# Altium PCB SDI-FIBER.PcbDoc (part 2 of 2)
Units mm, origin at the board's own origin, x right, y up, seen from the top; angles counter-clockwise.
Board outline 80.01 x 32 mm, 4 copper layers (Top Layer, Layer 1, Layer 2, Bottom Layer), stack 1.065 mm thick; 109 components, 63 nets, 333 pads, 163 vias.
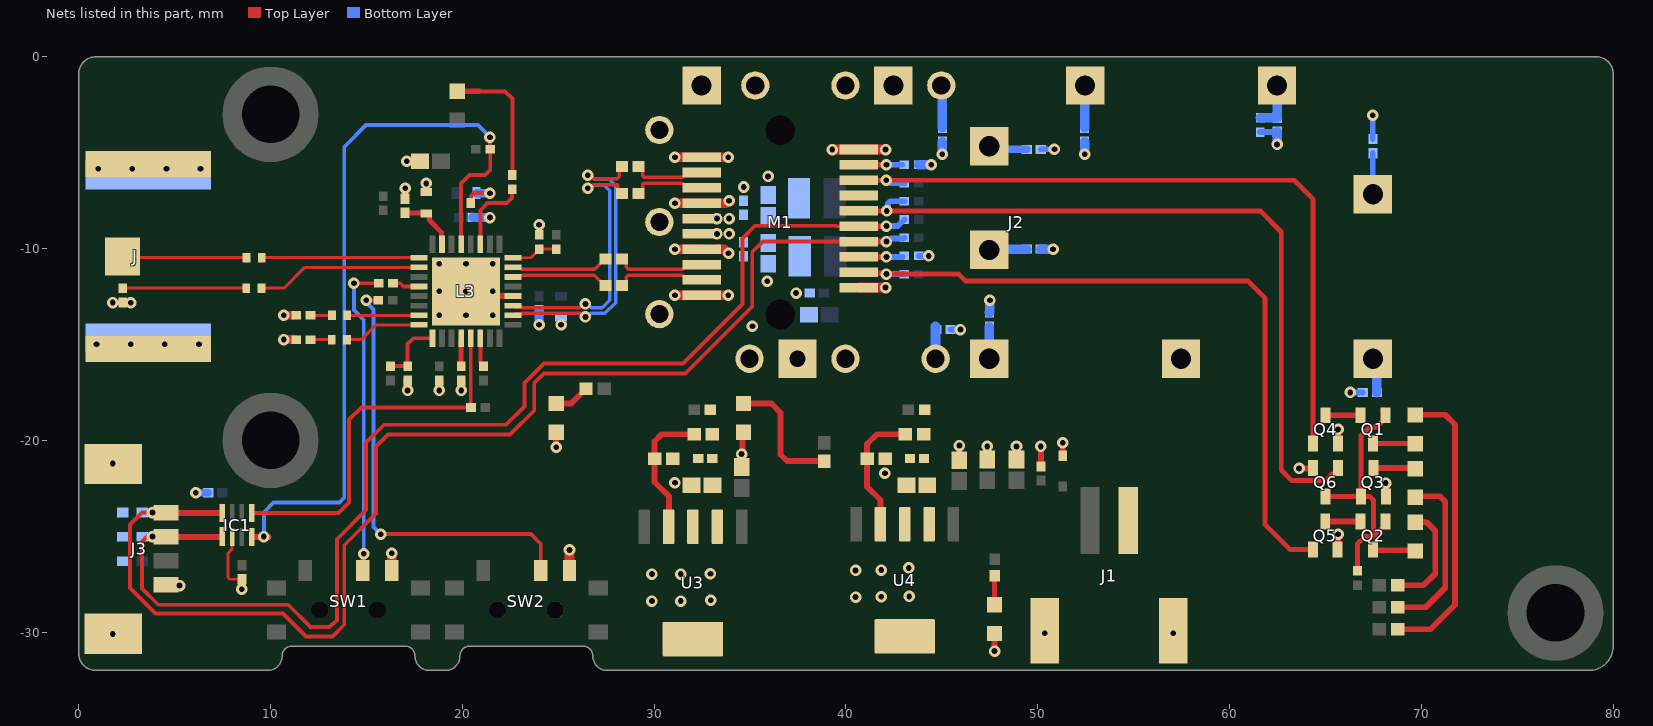
[diagram p4: the nets of this part, all layers, seen from the top]

## Via types
v1: diameter 0.6, hole 0.3, Top Layer to Bottom Layer, tented both sides, 163 vias

## Nets (pads, with @x,y where several pads share a name; then routed paths per layer and width w, separated by ;. In a path a pad name is that pad's centre, name@x,y a point inside that pad or via, vN(x,y) a via of type N, cw(c..) or ccw(c..) an arc to the next point about the centre after c; other vN are vias at no path point) (continued)
GND: C1.2 C2.2 C3.2 C4.2 C5.2 C6.2 C7.2 C8.2 C9.2 C10.2 C11.2 C12.2 C13.2 C14.2 C15.2 C16.2 C17.2 C18.2 C20.2 C21.2 C22.2 C23.2 C24.2 C25.2 C26.2 C27.2 C28.2 C29.2 C30.2 C31.2 C32.2 C35.2 C36.2 D1.2 D2.1 D3.1 D6.1 D7.1 D10.1 D11.1 IC1.2 J1.2 J1.MP1 J1.MP2 J3.4 J3.5 J3.6 J.S1 J.S2 J.S3 J.S4 L3.20 L3.33 M1.1 M1.10 M1.11 M1.14 M1.17 M1.20 Q3.2 Q4.2 Q5.2 Q6.2 R1.2 R9.2 R10.2 R11.2 R13.2 R14.2 R25.2 R26.2 R27.2 R32.1 R33.1 R34.2 R36.2 SW1.L2 SW2.L2 U3.3 U3.6 U4.3 U4.6 | length 52.4
  Top Layer w0.152: IC1.2@8.001,-25.044 8.001,-25.667 7.785,-25.883 7.785,-27.153 7.874,-27.242 C31.2@8.501,-27.242
  Top Layer w0.203: R1.2@20.439,-7.626 20.447,-7.618 20.447,-7.263 20.598,-7.112 v1(21.442,-7.112) ; R34.2@24.003,-9.283 v1(24.003,-8.763)
  Top Layer w0.3: v1(1.778,-12.815) 2.274,-12.815 R25.2@2.28,-12.821 ; C36.2@17.018,-7.395 v1(17.018,-6.858) ; C35.2@18.117,-7.062 v1(18.117,-6.604) ; v1(20.189,-12.229) 20.439,-12.479 L3.20@22.639,-12.479
  Top Layer w0.305: J3.4@4.572,-27.574 v1(5.254,-27.574) ; v1(24.892,-20.355) D6.1@24.892,-19.673 ; C20.2@34.561,-21.398 34.613,-21.346 34.613,-19.632 D7.1@34.664,-19.58 ; v1(45.919,-20.273) 45.919,-20.955 C23.2@45.934,-20.97 ; v1(47.371,-20.32) C17.2@47.371,-21.002 C17.2@47.386,-21.017 ; v1(47.752,-30.988) D3.1@47.752,-30.075 ; v1(48.895,-20.32) C16.2@48.895,-21.002 C16.2@48.91,-21.017 ; C18.2@50.165,-21.365 v1(50.165,-20.32) ; v1(51.308,-20.124) D1.2@51.308,-20.806 D1.2@51.323,-20.821 ; v1(63.627,-21.463) 64.309,-21.463 Q6.2@64.324,-21.448 ; v1(65.659,-24.892) 65.659,-25.574 Q5.2@65.674,-25.589 ; v1(65.659,-19.431) 65.659,-20.113 Q4.2@65.674,-20.128 ; v1(68.142,-22.225) 68.142,-22.907 Q3.2@68.157,-22.922
  Top Layer w0.381: R25.2@2.286,-12.815 2.289,-12.818 2.704,-12.818 v1(2.707,-12.821)
  Top Layer w0.457: v1(8.501,-27.762) C31.2@8.501,-27.242 ; v1(10.687,-14.749) R26.2@11.334,-14.749 ; v1(10.687,-13.479) R27.2@11.334,-13.479 ; v1(17.145,-17.399) R13.2@17.145,-16.879 ; v1(18.796,-17.399) R14.2@18.796,-16.879 ; v1(19.939,-17.399) R36.2@19.939,-16.879
  Top Layer w0.508: SW1.L2@16.317,-26.797 v1(16.317,-25.886) ; v1(17.101,-5.453) C26.2@17.798,-5.453 ; SW2.L2@25.588,-26.709 v1(25.588,-25.717) ; v1(31.087,-12.436) M1.20@32.476,-12.436 v1(33.865,-12.436) ; v1(31.087,-10.036) M1.17@32.476,-10.036 ; v1(31.087,-7.636) M1.14@32.476,-7.636 32.48,-7.632 33.76,-7.632 33.884,-7.507 v1(33.909,-7.507) ; v1(31.087,-5.236) M1.11@32.476,-5.236 v1(33.865,-5.236) ; M1.17@33.222,-10.04 33.648,-10.04 33.859,-10.251 v1(33.884,-10.251) ; v1(39.287,-4.836) M1.10@40.676,-4.836 v1(42.065,-4.836) ; M1.1@40.676,-12.036 v1(42.065,-12.036)
  Bottom Layer w0.254: C12.2@67.476,-4.289 C12.2@67.476,-4.256
  Bottom Layer w0.3: C10.2@50.165,-4.826 v1(50.876,-4.826) ; v1(66.294,-17.504) C11.2@66.955,-17.504 ; C12.2@67.476,-4.289 v1(67.476,-3.048)
  Bottom Layer w0.305: R9.2@43.8,-10.384 v1(44.323,-10.384) ; C13.2@45.452,-14.224 v1(45.974,-14.224) ; R10.2@61.595,-3.931 61.602,-3.924 62.485,-3.924 C14.2@62.488,-3.921
  Bottom Layer w0.381: v1(6.096,-22.733) C32.2@6.745,-22.733
  Bottom Layer w0.457: C30.2@20.556,-8.382 v1(21.442,-8.382) ; C28.2@20.743,-7.112 v1(21.442,-7.112) ; v1(24.003,-13.979) C29.2@24.003,-13.22
  Bottom Layer w0.5: R11.2@43.8,-5.636 v1(44.45,-5.636) ; v1(45.027,-5.08) C7.2@45.027,-4.431 ; C8.2@47.476,-13.335 47.49,-13.321 47.49,-12.748 47.511,-12.727 v1(47.511,-12.7) ; C9.2@50.165,-10.033 v1(50.8,-10.033) ; v1(52.451,-5.08) C15.2@52.451,-4.431 ; v1(62.484,-4.572) 62.488,-4.568 C14.2@62.488,-3.921
  other v1: 1.778,-30.099 50.371,-30.059 57.071,-30.059 29.886,-28.378 31.39,-28.378 32.959,-28.34 40.506,-28.175 41.839,-28.156 43.3,-28.137 29.886,-26.97 31.39,-26.97 32.934,-26.951 40.506,-26.782 41.839,-26.763 43.275,-26.651 31.087,-22.215 42.037,-21.717 1.778,-21.209 34.561,-20.716 0.929,-14.986 2.707,-14.986 4.485,-14.986 6.263,-14.986 35.129,-14.053 25.146,-13.979 18.796,-13.479 20.189,-13.479 21.59,-13.479 37.401,-12.319 18.796,-12.229 21.59,-12.229 35.897,-11.707 18.796,-10.795 20.189,-10.795 21.59,-10.795 34.671,-6.791 35.941,-6.24 1.016,-5.842 2.794,-5.842 4.572,-5.842 6.35,-5.842
HOST_EQ0: L3.9 R3.2 R13.1 | length 3.5
  Top Layer w0.203: R3.2@16.256,-16.129 R13.1@17.145,-16.129 17.145,-14.986 17.452,-14.679 L3.9@18.439,-14.679
I2C_SCL: D10.2 IC1.1 J3.2 M1.5 R7.2 | length 63.4
  Top Layer w0.203: J3.2@4.413,-25.044 4.388,-25.019 v1(3.843,-25.019) 3.556,-25.019 3.302,-25.273 3.302,-27.733 4.144,-28.575 10.922,-28.575 12.09,-29.743 13.081,-29.743 13.462,-29.362 13.462,-25.157 14.986,-23.633 14.986,-20.11 15.906,-19.189 22.28,-19.189 23.241,-18.228 23.241,-17.018 24.257,-16.002 31.496,-16.002 34.61,-12.888 34.61,-9.469 35.27,-8.809 39.476,-8.809 ; 39.476,-8.836 M1.5@40.676,-8.836
  Top Layer w0.3: J3.2@4.413,-25.044 7.476,-25.044 IC1.1@7.476,-25.019 ; M1.5@40.676,-8.836 40.681,-8.831 42.109,-8.831 v1(42.114,-8.826)
  Bottom Layer w0.3: v1(42.114,-8.826) 42.708,-8.826 R7.2@43.05,-8.485
I2C_SDA: D2.2 IC1.8 J3.1 M1.4 R8.2 | length 65.4
  Top Layer w0.203: J3.1@4.413,-23.794 4.383,-23.764 v1(3.843,-23.764) 3.302,-23.764 2.667,-24.399 2.667,-27.695 4,-29.028 10.66,-29.028 11.858,-30.226 13.233,-30.226 13.843,-29.616 13.843,-25.469 15.494,-23.818 15.494,-20.32 16.117,-19.697 22.49,-19.697 23.749,-18.439 23.749,-17.018 24.257,-16.51 31.623,-16.51 35.118,-13.015 35.118,-10.182 35.67,-9.631 40.622,-9.631 M1.4@40.633,-9.62
  Top Layer w0.3: J3.1@4.413,-23.794 IC1.8@7.476,-23.794 ; M1.4@40.676,-9.636 v1(42.114,-9.636)
  Bottom Layer w0.3: v1(42.114,-9.636) 42.195,-9.636 42.35,-9.481 43.003,-9.481 R8.2@43.05,-9.434
IN0_C_N: C39.2 L3.18 | length 15.9
  Top Layer w0.179: L3.18@22.639,-13.479 22.7,-13.418 23.068,-13.418 23.104,-13.382 26.117,-13.382 26.302,-13.567 v1(26.416,-13.567) ; v1(26.543,-6.182) 26.657,-6.182 26.842,-6.367 28.067,-6.367 28.172,-6.263 28.172,-5.864 C39.2@28.321,-5.715
  Bottom Layer w0.179: v1(26.416,-13.567) 26.53,-13.567 26.715,-13.382 27.432,-13.382 27.992,-12.822 27.992,-6.731 27.627,-6.367 26.842,-6.367 26.657,-6.182 v1(26.543,-6.182)
IN0_C_P: C38.2 L3.19 | length 14.6
  Top Layer w0.179: L3.19@22.639,-12.979 22.7,-13.04 23.068,-13.04 23.104,-13.076 26.117,-13.076 26.302,-12.891 v1(26.416,-12.891) ; v1(26.543,-6.858) 26.657,-6.858 26.842,-6.673 28.067,-6.673 28.103,-6.708 28.103,-6.927 28.3,-7.124 C38.2@28.321,-7.124
  Bottom Layer w0.179: v1(26.416,-12.891) 26.53,-12.891 26.715,-13.076 27.305,-13.076 27.686,-12.696 27.686,-6.985 27.374,-6.673 26.842,-6.673 26.657,-6.858 v1(26.543,-6.858)
LOCK0: L3.27 R35.2 | length 4.1
  Top Layer w0.203: L3.27@20.939,-9.779 20.939,-8.001 21.308,-7.632 22.316,-7.632 22.582,-7.366 22.582,-6.939 R35.2@22.606,-6.916
MOD_ABS: M1.6 Q6.1 R4.2 | length 39.7
  Top Layer w0.254: M1.6@40.676,-8.036 v1@42.114,-8.036 ; v1(42.136,-8.036) 61.595,-8.036 62.697,-9.138 62.697,-21.549 63.246,-22.098 65.013,-22.098 65.371,-21.74 65.526,-21.74 65.659,-21.607 Q6.1@65.659,-21.452
  Bottom Layer w0.3: v1(42.136,-8.036) 42.193,-7.979 42.193,-7.653 42.312,-7.535 R4.2@43.05,-7.535
MOD_PRST: Q1.1 Q2.1 Q3.1 Q6.3 R22.2 | length 13.6
  Top Layer w0.254: Q6.3@65.009,-22.922 Q3.1@66.857,-22.922 ; R22.2@66.675,-26.797 66.675,-25.4 67.056,-25.019 67.507,-25.019 ; Q2.1@68.142,-24.229 68.142,-24.384 67.507,-25.019 ; Q3.1@66.857,-22.922 66.857,-19.757 67.31,-19.304 67.683,-19.304 68.142,-18.846 Q1.1@68.142,-18.691 ; Q3.1@66.857,-22.922 67.31,-22.922 67.507,-23.119 67.507,-25.019 ; Q1.1@68.142,-18.691 68.142,-18.536 68.086,-18.48 68.009,-18.403 68.009,-18.558 68.064,-18.613 Q1.1@68.142,-18.691
MODE_SEL: L3.12 R36.1 | length 1.4
  Top Layer w0.254: R36.1@19.939,-16.129 L3.12@19.939,-14.679
NetC3_1: C3.1 C4.1 L1.2 M1.15 | length 0.1
  Top Layer w0.3: M1.15@32.376,-8.336 M1.15@32.476,-8.436
  other v1: 33.274,-8.436 33.909,-8.436
NetC5_1: C5.1 C6.1 L2.2 M1.16 | length 0.1
  Top Layer w0.3: M1.16@32.422,-9.29 M1.16@32.476,-9.236
  other v1: 33.274,-9.236 33.909,-9.236
NetC7_1: C7.1 C8.1 C9.1 C10.1 C11.1 C12.1 C13.1 C14.1 C15.1 J2.MH1 J2.MH2 J2.MH3 J2.MH4 J2.MH5 J2.MH6 J2.MH7 J2.MH8 J2.MH9 J2.MH10 J2.MH11 J2.MH12 J2.MH13 J2.MH14 J2.MH15 J2.MH16 J2.MH17 J2.MH18 J2.MH19 J2.MH20 R10.1 | length 18.1
  Bottom Layer w0.254: J2.MH1@67.437,-15.709 J2.MH1@67.476,-15.748
  Bottom Layer w0.3: J2.MH20@47.476,-4.668 J2.MH20@47.634,-4.826 ; J2.MH2@67.476,-7.168 C12.1@67.476,-5.022
  Bottom Layer w0.381: J2.MH20@47.634,-4.826 C10.1@49.432,-4.826
  Bottom Layer w0.5: C7.1@45.027,-3.697 J2.MH5@45.027,-1.677 ; J2.MH17@47.476,-15.748 C8.1@47.476,-14.068 ; J2.MH19@47.476,-10.068 47.511,-10.033 C9.1@49.432,-10.033 ; J2.MH4@52.426,-1.55 52.451,-1.575 C15.1@52.451,-3.697 ; R10.1@61.595,-3.181 61.597,-3.183 C14.1@62.492,-3.183 J2.MH3@62.492,-1.55 ; J2.MH1@67.476,-15.748 67.689,-15.961 C11.1@67.689,-17.504
  Bottom Layer w0.508: J2.MH16@44.676,-15.748 C13.1@44.676,-14.068
NetC21_1: C21.1 C22.1 R23.2 R29.1 U3.2
NetC24_1: C24.1 C25.1 R24.2 R31.2 U4.2
NetC35_1: C35.1 C36.1 L3.31 | length 3
  Top Layer w0.254: C36.1@17.018,-8.128 17.035,-8.145 C35.1@18.017,-8.145 ; C35.1@18.117,-8.162 18.208,-8.162 18.291,-8.245 18.291,-8.539 18.92,-9.168 18.92,-9.76 L3.31@18.939,-9.779
NetD3_2: D3.2 R17.2 | length 1.5
  Top Layer w0.254: D3.2@47.752,-28.575 R17.2@47.752,-27.051
NetD4_1: D4.1 Q1.3 | length 2.2
  Top Layer w0.254: Q1.3@67.492,-20.161 69.699,-20.161 D4.1@69.714,-20.176
NetD4_2: D4.2 R20.2 | length 15.2
  Top Layer w0.3: R20.2@68.768,-29.845 70.485,-29.845 71.755,-28.575 71.755,-19.177 71.247,-18.669 D4.2@69.721,-18.669
NetD5_1: D5.1 Q2.3 | length 2.2
  Top Layer w0.3: Q2.3@67.492,-25.699 67.527,-25.734 69.643,-25.734 D5.1@69.678,-25.769
NetD5_2: D5.2 R21.2 | length 5.7
  Top Layer w0.3: R21.2@68.768,-27.559 70.119,-27.559 70.724,-26.954 70.724,-24.71 70.283,-24.269 70.129,-24.269 70.089,-24.229 69.718,-24.229 D5.2@69.678,-24.269
NetD6_2: D6.2 R30.2 | length 1.9
  Top Layer w0.3: D6.2@24.892,-18.08 25.677,-18.08 26.249,-17.508 26.249,-17.483 26.424,-17.308 R30.2@26.449,-17.308
NetD7_2: D7.2 R2.2 | length 6.7
  Top Layer w0.3: D7.2@34.664,-18.08 36.114,-18.08 36.593,-18.559 36.593,-20.735 36.94,-21.082 R2.2@38.878,-21.082
NetD8_1: D8.1 Q3.3 | length 2.2
  Top Layer w0.3: Q3.3@67.507,-21.452 67.522,-21.437 69.678,-21.437 D8.1@69.693,-21.422
NetD8_2: D8.2 R18.2 | length 9.1
  Top Layer w0.3: R18.2@68.768,-28.702 70.231,-28.702 71.247,-27.686 71.247,-23.187 70.982,-22.922 D8.2@69.693,-22.922
NetD9_1: D9.1 R35.1 | length 8.2
  Top Layer w0.203: D9.1@19.734,-1.802 22.225,-1.802 22.606,-2.183 R35.1@22.606,-6.165
  Top Layer w0.305: D9.1@19.734,-1.802 20.894,-1.802
NetQ1_2: Q1.2 Q4.3 | length 1.8
  Top Layer w0.3: Q4.3@65.009,-18.691 Q1.2@66.842,-18.691
NetQ2_2: Q2.2 Q5.3 | length 1.8
  Top Layer w0.3: Q5.3@64.994,-24.229 Q2.2@66.842,-24.229
NetR15_2: R15.2 SW1.COM | length 16.5
  Top Layer w0.203: v1(14.351,-11.811) R15.2@15.633,-11.811
  Top Layer w0.3: SW1.COM@14.817,-26.797 14.838,-26.776 14.838,-25.929 v1(14.859,-25.908)
  Bottom Layer w0.203: v1(14.351,-11.811) 14.351,-13.208 14.859,-13.716 v1(14.859,-25.908)
NetR19_2: R19.2 SW2.COM | length 23
  Top Layer w0.203: v1(14.986,-12.7) R19.2@15.621,-12.7 ; v1(15.748,-24.892) 23.58,-24.892 24.088,-25.4 SW2.COM@24.088,-26.709
  Bottom Layer w0.203: v1(14.986,-12.7) 14.986,-12.793 15.367,-13.174 15.367,-24.511 v1(15.748,-24.892)
NetR29_2: R29.2 R32.2 U3.4 | length 7
  Top Layer w0.3: U3.4@30.751,-24.507 30.772,-24.486 30.772,-22.919 30.022,-22.169 R32.2@30.022,-20.955 30.022,-20.061 30.398,-19.685 R29.2@32.087,-19.685
NetR31_1: R31.1 R33.2 U4.4 | length 6.7
  Top Layer w0.3: U4.4@41.8,-24.376 41.8,-23.114 41.104,-22.418 41.104,-20.197 41.616,-19.685 R31.1@43.103,-19.685
OUT0_C_N: C41.2 L3.22 | length 5.1
  Top Layer w0.179: L3.22@22.639,-11.479 22.7,-11.418 23.068,-11.418 23.104,-11.382 24.487,-11.382 26.886,-11.382 27.442,-11.938 C41.2@27.464,-11.938
OUT0_C_P: C40.2 L3.23 | length 5.1
  Top Layer w0.179: L3.23@22.639,-10.979 22.7,-11.04 23.068,-11.04 23.104,-11.076 24.613,-11.076 26.907,-11.076 27.442,-10.541 C40.2@27.464,-10.541
OUT0_SEL: L3.4 R15.1 | length 1.4
  Top Layer w0.203: R15.1@16.383,-11.811 16.764,-11.811 16.932,-11.979 L3.4@17.739,-11.979
RD_N: C39.1 M1.12 | length 3.8
  Top Layer w0.179: C39.1@29.178,-5.715 29.2,-5.715 29.397,-5.912 29.397,-6.216 29.464,-6.283 31.479,-6.283 31.726,-6.036 M1.12@32.476,-6.036
RD_P: C38.1 M1.13 | length 3.8
  Top Layer w0.179: C38.1@29.178,-7.124 29.2,-7.124 29.397,-6.927 29.397,-6.656 29.464,-6.589 31.479,-6.589 31.726,-6.836 M1.13@32.476,-6.836
RS0: M1.7
RS1: M1.9 R11.1 | length 2.2
  Top Layer w0.3: M1.9@40.676,-5.636 v1(42.114,-5.636)
  Bottom Layer w0.3: v1(42.114,-5.636) R11.1@42.925,-5.636
RX_LOS: M1.8 Q4.1 R5.2 | length 37.8
  Top Layer w0.254: M1.8@40.676,-6.436 v1(42.109,-6.436) 63.373,-6.436 64.359,-7.422 Q4.1@64.359,-20.161
  Bottom Layer w0.3: v1(42.109,-6.436) 42.19,-6.436 42.34,-6.586 R5.2@43.05,-6.586
SCL_2V5: IC1.4 L3.29 R44.2 | length 40.3
  Top Layer w0.203: v1(9.652,-25.019) 9.672,-25.039 v1@9.911,-25.039 ; L3.29@19.939,-9.779 19.939,-6.604 20.378,-6.165 21.189,-6.165 21.457,-5.897 R44.2@21.457,-4.826 21.45,-4.819 21.45,-4.198 v1(21.442,-4.191)
  Top Layer w0.3: IC1.4@9.026,-25.044 9.906,-25.044 v1@9.911,-25.039
  Bottom Layer w0.203: v1(9.652,-25.019) 9.652,-23.749 10.16,-23.241 13.589,-23.241 13.843,-22.987 13.843,-4.699 14.986,-3.556 20.807,-3.556 v1(21.442,-4.191)
SDA_2V5: IC1.5 L3.13 R43.2 | length 19.8
  Top Layer w0.203: IC1.5@9.026,-23.794 10.922,-23.794 12.446,-23.794 13.544,-23.794 14.097,-23.241 14.097,-18.923 14.732,-18.288 20.439,-18.288 L3.13@20.439,-14.679
SDI0_IO_C_N: C33.2 L3.2 | length 8.7
  Top Layer w0.158: C33.2@9.525,-12.065 10.699,-12.065 11.785,-10.979 L3.2@17.739,-10.979
SDI0_IO_C_P: C19.2 L3.1 | length 8.2
  Top Layer w0.158: C19.2@9.544,-10.479 L3.1@17.739,-10.479
SDI0_IO_N: C33.1 R25.1 | length 6.4
  Top Layer w0.158: R25.1@2.286,-12.065 C33.1@8.725,-12.065
SDI0_IO_P: C19.1 J.1 | length 6.5
  Top Layer w0.158: J.1@2.286,-10.414 2.351,-10.479 C19.1@8.744,-10.479
SDI0_OUT+: C34.1 R26.1 | length 1.1
  Top Layer w0.158: R26.1@12.084,-14.749 C34.1@13.189,-14.749
SDI0_OUT-: C37.1 R27.1 | length 1.1
  Top Layer w0.158: R27.1@12.084,-13.479 C37.1@13.208,-13.479
SDI0_OUT_C+: C34.2 L3.8 | length 4.1
  Top Layer w0.158: C34.2@13.989,-14.749 14.732,-14.749 15.502,-13.979 L3.8@17.739,-13.979
SDI0_OUT_C-: C37.2 L3.7 | length 3.7
  Top Layer w0.158: C37.2@14.008,-13.479 L3.7@17.739,-13.479
SDI_OUT_SEL: L3.14 R12.2 | length 1.5
  Top Layer w0.203: L3.14@20.939,-14.679 20.939,-15.937 21.106,-16.104 R12.2@21.106,-16.129
SDI_VOD: L3.24 R34.1 R37.2 | length 2.5
  Top Layer w0.152: L3.24@22.639,-10.479 23.582,-10.479 24.003,-10.058 R34.1@24.003,-10.033 R37.2@24.892,-10.033
TD_N: C41.1 M1.19 | length 4.6
  Top Layer w0.179: C41.1@28.321,-11.938 28.342,-11.938 28.539,-11.741 28.539,-11.497 28.644,-11.392 30.48,-11.392 30.483,-11.389 31.479,-11.389 31.726,-11.636 M1.19@32.476,-11.636
TD_P: C40.1 M1.18 | length 4.6
  Top Layer w0.179: C40.1@28.321,-10.541 28.342,-10.541 28.539,-10.738 28.539,-10.982 28.644,-11.087 30.353,-11.087 30.357,-11.083 31.479,-11.083 31.726,-10.836 M1.18@32.476,-10.836
TX_DISABLE: M1.3 R9.1 | length 2.3
  Top Layer w0.3: M1.3@40.676,-10.436 v1(42.114,-10.436)
  Bottom Layer w0.3: v1(42.114,-10.436) R9.1@42.947,-10.436
TX_FAULT: M1.2 Q5.1 R6.2 | length 37.4
  Top Layer w0.254: M1.2@40.676,-11.236 40.724,-11.284 v1@42.065,-11.284 ; v1(42.114,-11.333) 45.877,-11.333 46.228,-11.684 60.96,-11.684 61.849,-12.573 61.849,-24.384 63.164,-25.699 Q5.1@64.344,-25.699
  Bottom Layer w0.3: v1(42.114,-11.333) R6.2@43.05,-11.333
pads on no net: L3.3 L3.6 L3.10 L3.15 L3.16 L3.17 L3.25 L3.26 M1.21 M1.22 SW1.M1 SW1.M2 SW1.M3 SW1.M4 SW1.M5 SW1.M6 SW2.M1 SW2.M2 SW2.M3 SW2.M4 SW2.M5 SW2.M6

## Polygon pours and split planes (outlines as drawn)
+2V5 on Bottom Layer "+2V5_L04_P000" (solid, remove dead copper, pour order 0): 16.317,-26.416 16.764,-25.969 16.764,-18.542 15.875,-17.653 15.875,-16.891 16.256,-16.51 21.59,-16.51 22.352,-15.748 22.352,-9.525 21.522,-8.695 18.982,-8.695 18.796,-8.509 18.796,-4.191 18.923,-4.064 25.273,-4.064 26.162,-4.953 26.162,-16.51 26.67,-17.018 30.607,-17.018 30.734,-17.145 30.734,-19.05 30.607,-19.177 26.162,-19.177 25.654,-19.685 25.654,-27.686 25.146,-28.194 11.354,-28.194 10.541,-27.381 10.541,-24.903 10.922,-24.522 12.584,-24.522 13.081,-25.019 13.081,-26.142 13.355,-26.416
GND on Layer 1 "GND_L02_P001" (solid, remove dead copper, pour order 1): 0,0 0,-32 80.01,-32 80.01,0
GND on Layer 2 "GND_L03_P002" (solid, remove dead copper, pour order 2): 0,0 0,-32 80.01,-32 80.01,0

## Keep-outs
Keep-Out Layer:
  lines w0.254: 0.885,-0.004 ccw(c0.885,-0.889) 0,-0.889 ; 0.885,0 79.121,0 cw(c79.121,-0.885) 80.006,-0.885 ; 80,-30.73 80,-0.879 ; 80.01,-30.73 cw(c78.74,-30.73) 78.74,-32 28.207,-32 27.56,-32 cw(c27.56,-31.242) 26.802,-31.242 ccw(c26.294,-31.242) 26.294,-30.734 20.382,-30.734 ccw(c20.382,-31.242) 19.874,-31.242 cw(c19.116,-31.242) 19.116,-32 18.289,-32 cw(c18.289,-31.242) 17.531,-31.242 ccw(c17.023,-31.242) 17.023,-30.734 11.111,-30.734 ccw(c11.111,-31.242) 10.603,-31.242 cw(c9.845,-31.242) 9.845,-32 9.198,-32 0.885,-32 cw(c0.885,-31.115) 0,-31.115 0,-0.889 ; 0,-0.889 0,-0.889

## Other copper
Top Layer:
  region net NetC24_1: 43.742,-18.888 43.742,-17.713 44.721,-17.713 44.721,-25.093 cw(c44.287,-25.093) 44.594,-25.4 cw(c44.287,-25.093) 44.287,-25.527 43.832,-25.527 ccw(c43.525,-25.527) 43.742,-25.31
  region: 1329 vertices and 0 holes, not listed, extent 0.896,-4.653 5.302,-0.366
  region net GND: 54.102,-26.289 54.229,-26.416 55.626,-26.416 55.753,-26.289 55.753,-17.018 55.372,-16.637 49.418,-16.637 48.72,-17.335 45.734,-17.335 45.356,-17.713 45.356,-20.129 45.673,-20.447 53.474,-20.447 54.102,-21.075 54.102,-24.194
  region net GND: 42.435,-23.241 42.435,-25.4 42.308,-25.527 40.53,-25.527 39.768,-26.289 39.768,-31.242 44.721,-31.242 44.721,-26.67 43.578,-25.527 43.578,-20.32 41.673,-20.32 41.546,-20.447 41.546,-22.352
  region net GND: 32.91,-26.035 33.037,-26.162 36.639,-26.162 37.25,-25.551 40.53,-25.551 40.554,-25.527 43.578,-25.527 44.814,-26.763 45.849,-26.763 46.345,-27.259 46.345,-31.379 46.101,-31.623 28.846,-31.623 28.321,-31.098 28.321,-26.179 28.846,-25.654 28.973,-25.781 31.386,-25.781 31.513,-25.654 31.513,-23.131 30.751,-22.369 30.751,-20.574 30.878,-20.447 32.402,-20.447 32.402,-25.527
  region net +3V3: 42.689,-18.923 43.534,-18.923 43.534,-17.713 42.687,-17.713
  region net +3V3: 38.227,-17.272 37.846,-17.653 37.846,-20.066 38.1,-20.32 40.005,-20.32 40.386,-20.32 41.656,-19.05 43.434,-19.05 43.561,-18.923 43.561,-17.399 43.434,-17.272 42.799,-17.272 42.672,-17.145 42.672,-12.573 42.545,-12.446 40.64,-12.446 40.513,-12.573 40.513,-14.732 41.021,-15.24 41.021,-16.256 40.005,-17.272
  region net +2V5: 11.06,-24.384 12.446,-24.384 12.567,-24.505 12.567,-27.946 12.446,-28.067 11.303,-28.067 11.176,-27.94 11.176,-26.797 8.255,-26.797 8.255,-23.114 8.776,-23.114 8.776,-25.794 10.528,-25.794 10.668,-25.654 10.668,-24.776
  region net +5V: 53.213,-26.416 53.34,-26.289 53.34,-22.098 53.086,-21.844 45.483,-21.844 45.229,-22.098 45.229,-26.059 45.586,-26.416 51.943,-26.416
  region net +2V5: 18.796,-3.385 18.879,-3.302 20.588,-3.302 20.701,-3.415 20.701,-5.326 20.439,-5.588 19.939,-5.588 19.685,-5.842 19.685,-10.287 19.177,-10.287 19.177,-8.874 18.796,-8.493
  region net +2V5: 25.527,-11.684 25.654,-11.811 25.654,-12.192 25.527,-12.319 23.331,-12.319 23.241,-12.229 22.098,-12.229 22.098,-11.811 23.241,-11.811 23.368,-11.684
  region net +2V5: 32.383,-17.266 32.383,-19.02 32.274,-19.129 27.56,-19.129 27.261,-18.83 27.261,-17.308 27.557,-17.012 32.146,-17.012 32.21,-17.012 32.298,-17.012 32.383,-17.097
  region net NetC21_1: 33.799,-25.527 33.672,-25.654 32.783,-25.654 32.656,-25.527 32.656,-17.911 33.799,-17.911
  region net +5V: 29.718,-25.527 29.972,-25.273 29.972,-22.733 29.591,-22.352 29.083,-22.352 28.956,-22.479 28.956,-25.4 29.091,-25.518 29.1,-25.527
  region net +5V: 34.18,-21.971 34.18,-25.527 34.688,-26.035 36.466,-26.035 36.72,-25.781 36.72,-22.098 36.593,-21.971
  region net NetC5_1: 31.496,-8.928 34.163,-8.928 34.29,-9.055 34.29,-9.436 34.163,-9.563 31.496,-9.563
  region net NetC3_1: 31.496,-8.128 34.163,-8.128 34.29,-8.255 34.29,-8.636 34.163,-8.763 31.496,-8.763
Bottom Layer:
  region net +3V3: 3.302,-26.035 4.191,-26.035 4.318,-26.162 4.318,-26.543 4.191,-26.67 3.302,-26.67
  region net I2C_SCL: 3.302,-24.75 4.191,-24.75 4.318,-24.877 4.318,-25.258 4.191,-25.385 3.302,-25.385
  region net I2C_SDA: 3.302,-23.495 4.191,-23.495 4.318,-23.622 4.318,-24.003 4.191,-24.13 3.302,-24.13
  region net GND: 2.159,-20.828 2.413,-21.082 2.413,-21.209 2.413,-30.099 2.159,-30.353 1.143,-30.353 0.889,-30.099 0.889,-20.955 1.016,-20.828
  region net GND: 32.385,-7.239 32.403,-7.257 32.403,-7.636 32.641,-7.874 35.014,-7.874 35.252,-7.636 36.288,-7.636 36.552,-7.372 36.522,-7.342 36.522,-6.24 36.45,-6.168 32.453,-6.168 32.398,-6.223
  region net GND: 35.306,-14.478 35.687,-14.097 35.687,-12.954 36.195,-12.446 36.957,-12.446 37.476,-12.965 37.476,-14.362 37.592,-14.478 38.481,-14.478 38.481,-11.938 38.354,-11.811 36.552,-11.811 36.341,-11.6 36.341,-10.4 35.137,-10.4 34.773,-10.036 33.638,-10.036 33.274,-10.4 33.274,-14.224 33.528,-14.478
  region net +3V3: 39.878,-13.986 43.291,-13.986 43.688,-13.589 45.085,-13.589 45.466,-13.208 45.466,-6.477 45.212,-6.223 43.688,-6.223 43.561,-6.35 43.561,-9.525 43.688,-9.652 44.577,-9.652 44.704,-9.779 44.704,-10.795 44.577,-10.922 43.815,-10.922 43.688,-11.049 43.688,-12.319 43.561,-12.446 40.64,-12.446 40.276,-12.082 40.276,-6.24 40.132,-6.096 38.862,-6.096 38.735,-6.223 38.735,-13.843 38.878,-13.986
  region net +5V: 34.173,-24.648 34.036,-24.511 29.21,-24.511 28.956,-24.257 28.956,-22.342 29.083,-22.215 30.276,-22.215 30.794,-22.733 33.655,-22.733 34.173,-22.215 48.25,-22.215 48.641,-22.606 48.641,-24.511 47.752,-25.4 40.259,-25.4 39.37,-24.511 36.83,-24.511 36.703,-24.638 36.703,-25.146 36.576,-25.273 34.29,-25.273 34.173,-25.156
  region net +2V5: 19.812,-6.477 18.923,-6.477 18.796,-6.604 18.796,-8.509 19.05,-8.763 19.685,-8.763 19.822,-8.626
  region net NetC5_1: 32.403,-8.909 32.276,-9.036 32.276,-9.544 32.398,-9.666 33.653,-9.669 33.655,-9.671 34.925,-9.671 35.052,-9.798 36.576,-9.798 36.576,-11.43 36.746,-11.6 38.057,-11.6 38.227,-11.43 38.227,-9.036 38.1,-8.909
  region net NetC3_1: 32.403,-8.001 32.276,-8.128 32.276,-8.636 32.403,-8.763 38.036,-8.763 38.227,-8.572 38.227,-6.223 38.1,-6.096 36.83,-6.096 36.703,-6.223 36.703,-7.512 36.341,-7.874 35.433,-7.874 35.306,-8.001

## Silkscreen, mask and mechanical layers (free items; w line width, h text height)
Top Overlay:
  region: 6.053,-21.322 6.053,-20.479 5.291,-20.479 5.291,-21.322
  region: 5.296,-29.957 5.296,-30.719 6.058,-30.719 6.058,-29.957
  region: 58.171,-30.734 58.171,-31.496 58.933,-31.496 58.933,-30.734
  region: 58.928,-23.623 58.928,-22.78 58.166,-22.78 58.166,-23.623
  rectangle: 17.653,-26.098 18.415,-25.336
  region: 10.542,-25.342 9.699,-25.342 9.699,-26.104 10.542,-26.104
  region: 19.813,-25.342 18.97,-25.342 18.97,-26.104 19.813,-26.104
  rectangle: 26.924,-26.098 27.686,-25.336
  region: 39.37,-18.091 cw(c39.37,-18.345) 39.624,-18.345 39.624,-19.361 cw(c39.37,-19.361) 39.37,-19.615
  region: 29.591,-18.074 cw(c29.591,-18.328) 29.845,-18.328 29.845,-19.344 cw(c29.591,-19.344) 29.591,-19.598
  region: 25.507,-1.772 cw(c25.507,-2.026) 25.761,-2.026 25.761,-3.042 cw(c25.507,-3.042) 25.507,-3.296
  region: 79.375,-24.257 cw(c79.375,-24.511) 79.629,-24.511 79.629,-25.527 cw(c79.375,-25.527) 79.375,-25.781
  region: 79.375,-18.669 cw(c79.375,-18.923) 79.629,-18.923 79.629,-19.939 cw(c79.375,-19.939) 79.375,-20.193
  region: 79.375,-21.463 cw(c79.375,-21.717) 79.629,-21.717 79.629,-22.733 cw(c79.375,-22.733) 79.375,-22.987
  region: 55.721,-21.431 55.721,-21.05 52.07,-21.05 52.07,-21.431
  region: 52.451,-21.844 52.832,-21.844 52.832,-20.637 52.451,-20.637
  region: 27.686,-25.907 27.686,-27.178 26.035,-27.178 26.035,-26.104 25.146,-26.104 25.146,-27.178 24.511,-27.178 24.511,-26.104 23.622,-26.104 23.622,-27.178 21.479,-27.178 21.479,-26.104 20.701,-26.104 20.701,-27.178 20.193,-27.178 18.97,-27.178 18.97,-25.913
  region: 18.415,-25.907 18.415,-27.178 16.764,-27.178 16.764,-26.104 15.875,-26.104 15.875,-27.178 15.24,-27.178 15.24,-26.104 14.351,-26.104 14.351,-27.178 12.208,-27.178 12.208,-26.104 11.303,-26.104 11.303,-27.178 10.922,-27.178 9.699,-27.178 9.699,-25.913
  lines w0.762: 6.053,-20.86 cw(c6.053,-21.241) 6.434,-21.241 ; 6.058,-30.338 ccw(c6.058,-29.957) 6.439,-29.957 ; 10.08,-25.342 cw(c10.461,-25.342) 10.461,-24.961 ; 17.653,-24.956 cw(c17.653,-25.337) 18.034,-25.337 ; 19.351,-25.342 cw(c19.732,-25.342) 19.732,-24.961 ; 26.924,-24.956 cw(c26.924,-25.337) 27.305,-25.337 ; 58.928,-23.161 cw(c58.928,-23.542) 59.309,-23.542 ; 58.933,-31.115 ccw(c58.933,-30.734) 59.314,-30.734
  text "LOCK" at 20.588,-3.296 h1.78
  text "+2V5" at 25.692,-19.592 h1.78
  text "+3V3" at 35.55,-19.615 h1.78
  text "RX LOS" at 70.461,-20.187 h1.78
  text "I2C" at 5.291,-21.241 h1.78 r270
  text "MOD PRST" at 70.465,-22.987 h1.78
  text "TX FAULT" at 70.465,-25.781 h1.78
  text "LOOP" at 10.461,-26.104 h1.78
  text "DIR" at 19.732,-26.104 h1.78
  text "POWER" at 59.69,-30.734 h1.78 r90
Top Solder:
  region: 1329 vertices and 0 holes, not listed, extent 0.896,-4.653 5.302,-0.366
Mechanical 1:
  drawing of 300 lines, arcs and shapes, not listed
  text "Layer" at 89.154,-0.381 h1.52
  text "Name" at 99.566,-0.381 h1.52
  text "Material" at 123.181,-0.381 h1.52
  text "Thickness" at 145.019,-0.381 h1.52
  text "Constant" at 161.525,-0.381 h1.52
  text "Board Layer Stack" at 176,-0.381 h1.52
  text "Top Overlay" at 99.566,-3.429 h1.52
  text "Top Solder" at 99.566,-6.477 h1.52
  text "Solder Resist" at 123.181,-6.477 h1.52
  text "0.010mm" at 145.019,-6.477 h1.52
  text "3.5" at 161.525,-6.477 h1.52
  text "1" at 89.154,-9.525 h1.52
  text "Top Layer" at 99.566,-9.525 h1.52
  text "0.038mm" at 145.019,-9.525 h1.52
  text "Dielectric 2" at 99.566,-12.573 h1.52
  text "PP-016" at 123.181,-12.573 h1.52
  text "0.221mm" at 145.019,-12.573 h1.52
  text "4.4" at 161.525,-12.573 h1.52
  text "2" at 89.154,-15.621 h1.52
  text "Layer 1" at 99.566,-15.621 h1.52
  text "CF-004" at 123.181,-15.621 h1.52
  text "0.018mm" at 145.019,-15.621 h1.52
  text "Dielectric 1" at 99.566,-18.669 h1.52
  text "FR-4" at 123.181,-18.669 h1.52
  text "0.510mm" at 145.019,-18.669 h1.52
  text "4.3" at 161.525,-18.669 h1.52
  text "3" at 89.154,-21.717 h1.52
  text "Layer 2" at 99.566,-21.717 h1.52
  text "CF-004" at 123.181,-21.717 h1.52
  text "0.018mm" at 145.019,-21.717 h1.52
  text "Dielectric 3" at 99.566,-24.765 h1.52
  text "PP-016" at 123.181,-24.765 h1.52
  text "0.221mm" at 145.019,-24.765 h1.52
  text "4.4" at 161.525,-24.765 h1.52
  text "4" at 89.154,-27.813 h1.52
  text "Bottom Layer" at 99.566,-27.813 h1.52
  text "0.038mm" at 145.019,-27.813 h1.52
  text "Bottom Solder" at 99.566,-30.861 h1.52
  text "Solder Resist" at 123.181,-30.861 h1.52
  text "0.010mm" at 145.019,-30.861 h1.52
  text "3.5" at 161.525,-30.861 h1.52
  text "Bottom Overlay" at 99.566,-33.909 h1.52

## Text inside footprints (layer, text, board x,y; h text height)
J: Mechanical 13 "PCB Edge" at -1.905,-5.715 h1.27 r270